# EAGLE board Minsys8051V3 (EAGLE 7.2.0)
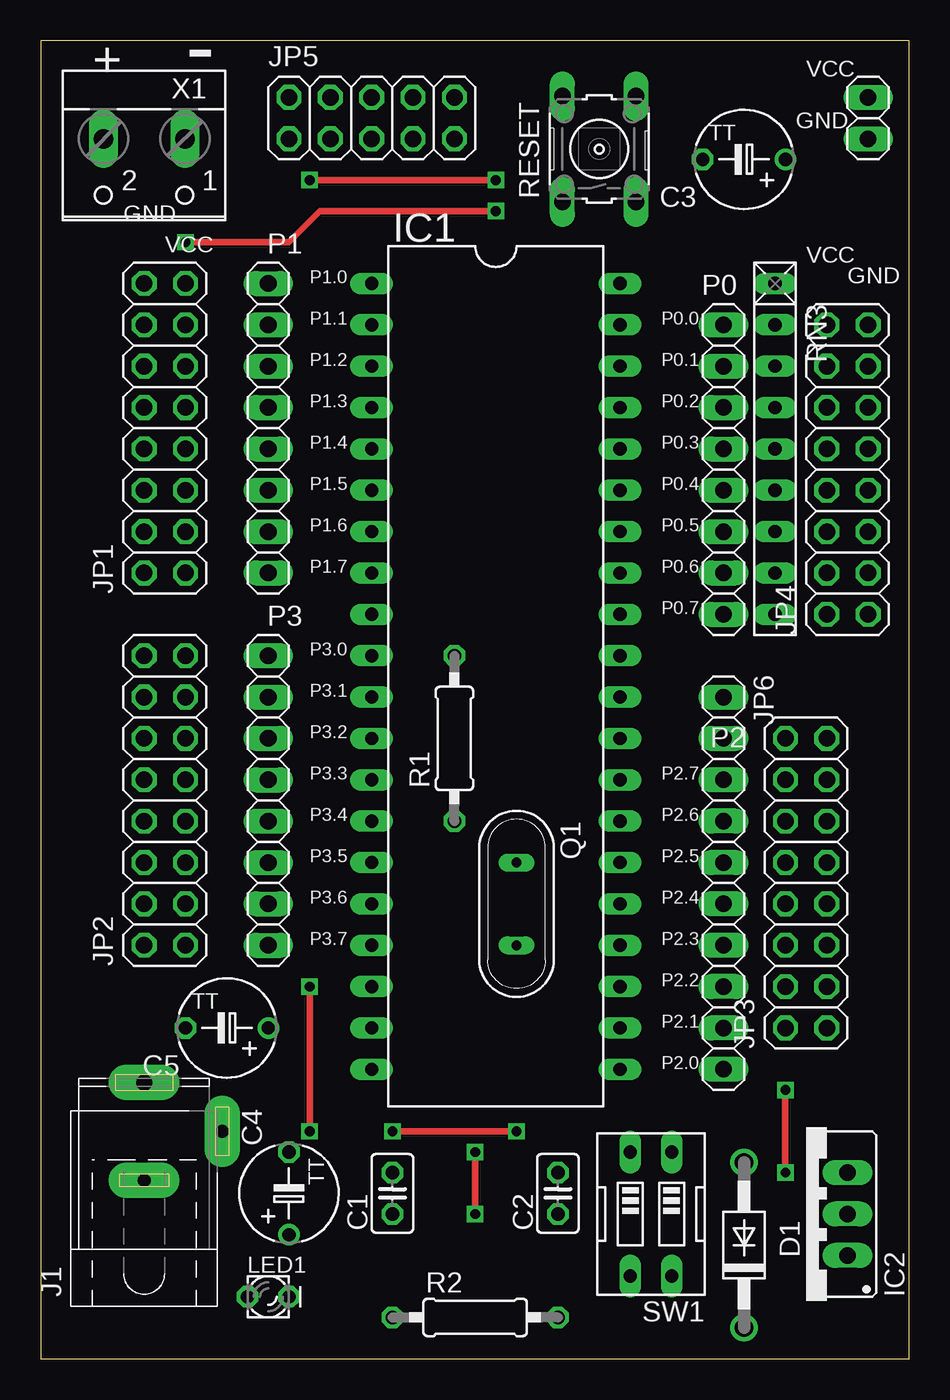
[diagram p0: board, top side]
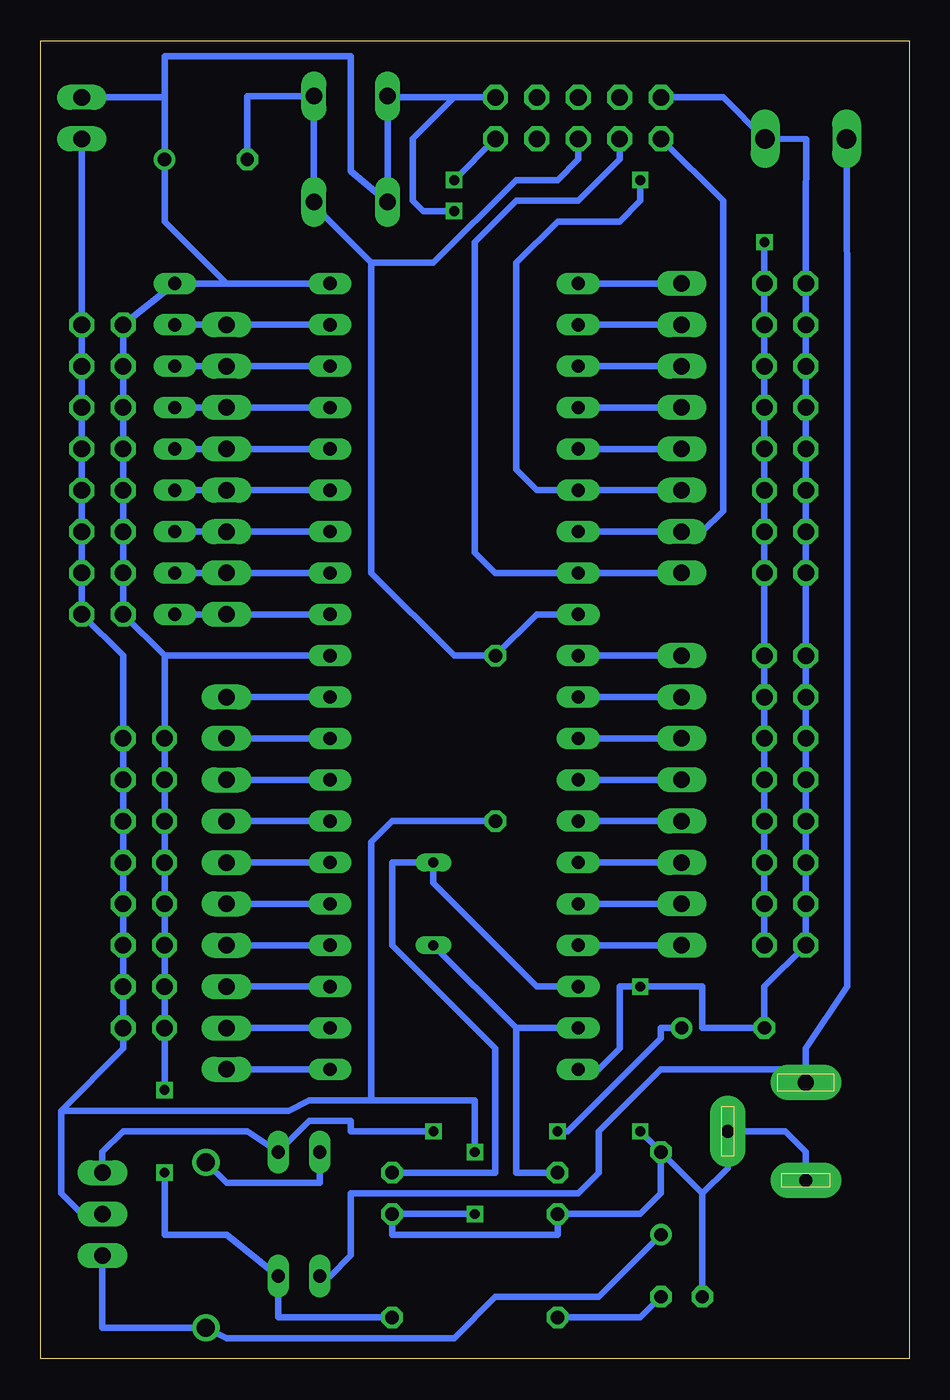
[diagram p1: board, bottom side, seen from below]

Size 53.32 x 80.95 mm. Coordinates in mm from the lower left corner, seen from the top.
Outline: 0,0 53.32,0 53.32,80.95 0,80.95 0,0
Copper layers (1*16): Top 0.035mm / dielectric 1.5mm / Bottom 0.035mm
Design rules "default": minimum track width 10mil, minimum drill 24mil, track to track 8mil, track to pad 8mil, pad to pad 8mil, via to via 8mil, smd to smd 8mil, copper to edge 40mil, drill to drill 8mil, minimum pad ring 10mil, minimum via ring 8mil, stop-mask expansion 4mil, vias tented up to drill 0mil, thermal gap 10mil

## Footprints (pad centres in the part's own frame; a part is rotated, then mirrored left to right if it is on the bottom)
C025-025X050 = drill 0.813 octagon: 1 -1.27,0; 2 1.27,0
TT5D6 = drill 0.813: + -2.54,0 | drill 0.813 octagon: - 2.54,0
DO41-10 = drill 1.118: A 5.08,0; C -5.08,0
DIL40 = drill 0.813 long: 1 -24.13,-7.62; 2 -21.59,-7.62; 3 -19.05,-7.62; 4 -16.51,-7.62; 5 -13.97,-7.62; 6 -11.43,-7.62; 7 -8.89,-7.62; 8 -6.35,-7.62; 9 -3.81,-7.62; 10 -1.27,-7.62; 11 1.27,-7.62; 12 3.81,-7.62; 13 6.35,-7.62; 14 8.89,-7.62; 15 11.43,-7.62; 16 13.97,-7.62; 17 16.51,-7.62; 18 19.05,-7.62; 19 21.59,-7.62; 20 24.13,-7.62; 21 24.13,7.62; 22 21.59,7.62; 23 19.05,7.62; 24 16.51,7.62; 25 13.97,7.62; 26 11.43,7.62; 27 8.89,7.62; 28 6.35,7.62; 29 3.81,7.62; 30 1.27,7.62; 31 -1.27,7.62; 32 -3.81,7.62; 33 -6.35,7.62; 34 -8.89,7.62; 35 -11.43,7.62; 36 -13.97,7.62; 37 -16.51,7.62; 38 -19.05,7.62; 39 -21.59,7.62; 40 -24.13,7.62
78XXS = drill 1.016 long: GND 0,-2.54; IN -2.54,-2.54; OUT 2.54,-2.54
SPC4078 = drill 0.8 pad 2.184 long: 1 -3,0; 2 0,-4.8 | drill 1 pad 2.184 long: 3 3,0
2X08 = drill 1.016 octagon: 1 -8.89,-1.27; 2 -8.89,1.27; 3 -6.35,-1.27; 4 -6.35,1.27; 5 -3.81,-1.27; 6 -3.81,1.27; 7 -1.27,-1.27; 8 -1.27,1.27; 9 1.27,-1.27; 10 1.27,1.27; 11 3.81,-1.27; 12 3.81,1.27; 13 6.35,-1.27; 14 6.35,1.27; 15 8.89,-1.27; 16 8.89,1.27
2X05 = drill 1.016 octagon: 1 -5.08,-1.27; 2 -5.08,1.27; 3 -2.54,-1.27; 4 -2.54,1.27; 5 0,-1.27; 6 0,1.27; 7 2.54,-1.27; 8 2.54,1.27; 9 5.08,-1.27; 10 5.08,1.27
1X02 = drill 1.016 long: 1 -1.27,0; 2 1.27,0
LED_LD260 = drill 0.813 octagon: A -1.27,0; K 1.27,0
1X08 = drill 1.016 long: 1 -8.89,0; 2 -6.35,0; 3 -3.81,0; 4 -1.27,0; 5 1.27,0; 6 3.81,0; 7 6.35,0; 8 8.89,0
QS = drill 0.61 long: 1 -2.54,0; 2 2.54,0
0207/10 = drill 0.813 octagon: 1 -5.08,0; 2 5.08,0
B3F-10XX = drill 1.016 long: 1 -3.251,2.261; 2 3.251,2.261; 3 -3.251,-2.261; 4 3.251,-2.261
RN-9 = drill 0.813 long: 1 -10.16,0; 2 -7.62,0; 3 -5.08,0; 4 -2.54,0; 5 0,0; 6 2.54,0; 7 5.08,0; 8 7.62,0; 9 10.16,0
EDG-02 = drill 0.813 long: 1 -1.27,-3.81; 2 1.27,-3.81; 3 1.27,3.81; 4 -1.27,3.81
W237-102 = drill 1.194 long: 1 -2.5,-1.27; 2 2.5,-1.27

## Placement (x,y rotation side)
C1  30pF  [C025-025X050]  21.59,10.16 90 top
C2  30pF  [C025-025X050]  31.75,10.16 90 top
C3  10uF  [TT5D6]  43.18,73.66 180 top
C4  0.33uF  [TT5D6]  15.24,10.16 90 top
C5  0.33uF  [TT5D6]  11.43,20.32 180 top
D1  1N4004  [DO41-10]  43.18,6.98 90 top
IC1  AT89C51-24PC  [DIL40]  27.94,41.91 270 top
IC2  7805  [78XXS]  46.99,8.89 90 top
J1  [SPC4078]  6.35,13.97 90 top
JP1  [2X08]  7.62,57.15 90 top
JP2  [2X08]  7.62,34.29 90 top
JP3  [2X08]  46.99,29.21 90 top
JP4  [2X08]  49.53,54.61 90 top
JP5  [2X05]  20.32,76.2 0 top
JP6  [1X02]  41.91,39.37 270 top
LED1  [LED_LD260]  13.97,3.81 0 top
P0  [1X08]  41.91,54.61 270 top
P1  [1X08]  13.97,57.15 270 top
P2  [1X08]  41.91,26.67 90 top
P3  [1X08]  13.97,34.29 270 top
Q1  11.0592 MHz  [QS]  29.21,27.94 270 top
R1  10k  [0207/10]  25.4,38.1 90 top
R2  220  [0207/10]  26.67,2.54 0 top
RESET  [B3F-10XX]  34.29,74.3 90 top
RN3  [RN-9]  45.09,55.88 270 top
SW1  [EDG-02]  37.47,8.89 180 top
VCCGND  [1X02]  50.8,76.2 270 top
X1  [W237-102]  6.35,73.66 180 top

## Library data of the parts
C1-C5 = resistor
D1 = diode
IC1 = atmel; OC_FARNELL: unknown; OC_NEWARK: unknown
IC2 = v-reg
J1 = con-jack; OC_FARNELL: unknown; OC_NEWARK: unknown
JP1-JP6 P0 P1-P3 VCCGND = pinhead
LED1 = eagle-ltspice; SPICEMODEL: NONE; SPICEPREFIX: D; SPICETYPE: diode
Q1 SW1 = special
R1 R2 = eagle-ltspice; SPICEMODEL: NONE; SPICEPREFIX: R
RESET = switch-omron; MPN: B3F-1000; OC_FARNELL: 176432; OC_NEWARK: 36M3542
RN3 = resistor-net; OC_FARNELL: unknown; OC_NEWARK: unknown
X1 = con-wago-500; MPN: 237-102; OC_FARNELL: unknown; OC_NEWARK: 70K9898

## Nets
GND: C1.1 C2.1 C4.- C5.- IC1.20 IC2.GND J1.1 J1.2 JP1.2 JP1.4 JP1.6 JP1.8 JP1.10 JP1.12 JP1.14 JP1.16 JP2.2 JP2.4 JP2.6 JP2.8 JP2.10 JP2.12 JP2.14 JP2.16 JP3.1 JP3.3 JP3.5 JP3.7 JP3.9 JP3.11 JP3.13 JP3.15 JP4.1 JP4.3 JP4.5 JP4.7 JP4.9 JP4.11 JP4.13 JP4.15 JP5.2 LED1.A R1.1 VCCGND.2 X1.1
MISO: IC1.7 JP5.1 P1.7
MOSI: IC1.6 JP5.9 P1.6
N$1: IC1.30 JP6.1
N$2: LED1.K R2.1
N$3: C1.2 IC1.19 Q1.2
N$4: C2.2 IC1.18 Q1.1
N$5: IC1.29 JP6.2
N$7: J1.3 SW1.3 X1.2
N$8: D1.A SW1.2
N$10: C5.+ IC2.OUT SW1.1
N$12: JP5.7
N$38: C4.+ D1.C IC2.IN
P00: IC1.39 P0.1 RN3.2
P01: IC1.38 P0.2 RN3.3
P02: IC1.37 P0.3 RN3.4
P03: IC1.36 P0.4 RN3.5
P04: IC1.35 P0.5 RN3.6
P05: IC1.34 P0.6 RN3.7
P06: IC1.33 P0.7 RN3.8
P07: IC1.32 P0.8 RN3.9
P10: IC1.1 P1.1
P11: IC1.2 P1.2
P12: IC1.3 P1.3
P13: IC1.4 P1.4
P14: IC1.5 P1.5
P20: IC1.21 P2.1
P21: IC1.22 P2.2
P22: IC1.23 P2.3
P23: IC1.24 P2.4
P24: IC1.25 P2.5
P25: IC1.26 P2.6
P26: IC1.27 P2.7
P27: IC1.28 P2.8
P30: IC1.10 P3.1
P31: IC1.11 P3.2
P32: IC1.12 P3.3
P33: IC1.13 P3.4
P34: IC1.14 P3.5
P35: IC1.15 P3.6
P36: IC1.16 P3.7
P37: IC1.17 P3.8
RST: C3.- IC1.9 JP5.5 R1.2 RESET.3 RESET.4
SCK: IC1.8 JP5.3 P1.8
VCC: C3.+ IC1.31 IC1.40 JP1.1 JP1.3 JP1.5 JP1.7 JP1.9 JP1.11 JP1.13 JP1.15 JP2.1 JP2.3 JP2.5 JP2.7 JP2.9 JP2.11 JP2.13 JP2.15 JP3.2 JP3.4 JP3.6 JP3.8 JP3.10 JP3.12 JP3.14 JP3.16 JP4.2 JP4.4 JP4.6 JP4.8 JP4.10 JP4.12 JP4.14 JP4.16 JP5.10 R2.2 RESET.1 RESET.2 RN3.1 SW1.4 VCCGND.1

## Tracks (layer width: path | path; a pad name or v marks a point on that pad's centre or on a via)
GND  (via drill 0.6)
  Top 0.406: v16.51,13.97 v16.51,22.86 | v26.67,8.89 v26.67,12.7
  Bottom 0.406: J1.1 6.35,12.7 7.62,13.97 J1.2 11.15,11.71 12.7,10.16 | C4.- 12.7,10.16 | 12.7,10.16 LED1.A | IC1.20 19.05,17.78 17.78,19.05 17.78,22.86 v16.51,22.86 12.7,22.86 12.7,20.32 C5.- 8.89,22.86 JP2.2 JP2.4 JP2.6 JP2.8 JP2.10 JP2.12 JP2.14 JP2.16 JP1.2 JP1.4 JP1.6 JP1.8 JP1.10 JP1.12 JP1.14 JP1.16 6.35,69.85 6.31,74.89 X1.1 8.89,74.93 11.43,77.47 JP5.2 | C4.- 15.24,10.16 16.51,8.89 C1.1 21.59,7.62 31.75,7.62 C2.1 v26.67,8.89 | VCCGND.2 JP4.15 JP4.13 JP4.11 JP4.9 JP4.7 JP4.5 JP4.3 JP4.1 48.26,43.18 JP3.15 JP3.13 JP3.11 JP3.9 JP3.7 JP3.5 JP3.3 JP3.1 48.26,19.05 52.07,15.24 | C4.- v16.51,13.97 | 52.07,15.24 52.07,10.16 50.8,8.89 IC2.GND | v26.67,12.7 26.67,15.88 33.02,15.88 | 33.02,15.88 36.83,15.88 38.1,15.24 52.07,15.24 | R1.1 31.75,33.02 33.02,31.75 33.02,15.88
MISO
  Bottom 0.406: IC1.7 P1.7 12.7,50.8 11.43,52.07 11.43,71.12 JP5.1
MOSI  (via drill 0.6)
  Top 0.406: v27.94,72.39 v16.51,72.39
  Bottom 0.406: P1.6 IC1.6 22.86,53.34 24.13,54.61 24.13,67.31 21.59,69.85 17.78,69.85 16.51,71.12 v16.51,72.39 | JP5.9 v27.94,72.39
N$1
  Bottom 0.406: IC1.30 JP6.1
N$2
  Bottom 0.406: LED1.K 16.51,2.54 R2.1
N$3
  Bottom 0.406: Q1.2 24.13,20.32 | 24.13,20.32 IC1.19 | C1.2 24.13,11.43 24.13,20.32
N$4
  Bottom 0.406: IC1.18 22.86,22.86 29.21,29.21 Q1.1 31.75,30.48 31.75,25.4 25.4,19.05 25.4,11.43 C2.2
N$5
  Bottom 0.406: IC1.29 JP6.2
N$7
  Bottom 0.406: X1.2 3.85,68.62 3.81,67.31 3.81,22.86 6.35,19.05 6.35,17.78 | 6.35,17.78 J1.3 | 6.35,17.78 15.24,17.78 19.05,13.97 19.05,11.43 20.32,10.16 34.29,10.16 34.29,6.35 35.56,5.08 SW1.3
N$8
  Bottom 0.406: SW1.2 36.2,10.79 41.91,10.79 D1.A
N$10  (via drill 0.6)
  Top 0.406: v21.59,13.97 v29.21,13.97
  Bottom 0.406: v29.21,13.97 34.29,13.97 34.29,14.61 36.83,14.61 SW1.1 40.64,13.97 48.26,13.97 49.53,12.7 IC2.OUT | C5.+ 15.24,20.32 15.24,19.68 20.95,13.97 v21.59,13.97
N$38
  Bottom 0.406: C4.+ 19.05,3.81 25.4,3.81 27.94,1.27 41.91,1.27 D1.C 49.53,1.91 IC2.IN
P00
  Bottom 0.406: RN3.2 P0.1 IC1.39
P01
  Bottom 0.406: RN3.3 P0.2 IC1.38
P02
  Bottom 0.406: IC1.37 P0.3 RN3.4
P03
  Bottom 0.406: IC1.36 P0.4 RN3.5
P04
  Bottom 0.406: IC1.35 P0.5 RN3.6
P05
  Bottom 0.406: IC1.34 P0.6 RN3.7
P06
  Bottom 0.406: IC1.33 P0.7 RN3.8
P07
  Bottom 0.406: IC1.32 P0.8 RN3.9
P10
  Bottom 0.406: P1.1 IC1.1
P11
  Bottom 0.406: P1.2 IC1.2
P12
  Bottom 0.406: P1.3 IC1.3
P13
  Bottom 0.406: P1.4 IC1.4
P14
  Bottom 0.406: P1.5 IC1.5
P20
  Bottom 0.406: IC1.21 P2.1
P21
  Bottom 0.406: IC1.22 P2.2
P22
  Bottom 0.406: IC1.23 P2.3
P23
  Bottom 0.406: IC1.24 P2.4
P24
  Bottom 0.406: IC1.25 P2.5
P25
  Bottom 0.406: IC1.26 P2.6
P26
  Bottom 0.406: IC1.27 P2.7
P27
  Bottom 0.406: IC1.28 P2.8
P30
  Bottom 0.406: IC1.10 P3.1
P31
  Bottom 0.406: IC1.11 P3.2
P32
  Bottom 0.406: IC1.12 P3.3
P33
  Bottom 0.406: IC1.13 P3.4
P34
  Bottom 0.406: IC1.14 P3.5
P35
  Bottom 0.406: IC1.15 P3.6
P36
  Bottom 0.406: IC1.16 P3.7
P37
  Bottom 0.406: IC1.17 P3.8
RST
  Bottom 0.406: C3.- 40.64,77.55 RESET.4 RESET.3 36.55,70.84 33.02,67.31 | IC1.9 22.86,45.72 R1.2 27.94,43.18 33.02,48.26 33.02,67.31 | JP5.5 20.32,73.66 21.59,72.39 24.13,72.39 29.21,67.31 33.02,67.31
SCK
  Bottom 0.406: P1.8 IC1.8 25.4,48.26 26.67,49.53 26.67,68.58 24.13,71.12 20.32,71.12 17.78,73.66 JP5.3
VCC  (via drill 0.6)
  Top 0.406: v45.72,16.51 v45.72,11.43 | v27.94,70.48 17.14,70.48 15.24,68.58 v8.89,68.58
  Bottom 0.406: 45.72,77.47 45.72,80.01 34.29,80.01 34.29,72.95 RESET.1 RESET.2 31.95,77.47 JP5.10 27.94,77.47 30.48,74.93 30.48,71.12 29.84,70.48 v27.94,70.48 | 45.72,77.47 C3.+ 45.72,69.85 41.91,66.04 IC1.40 RN3.1 JP4.16 JP4.14 JP4.12 JP4.10 JP4.8 JP4.6 JP4.4 JP4.2 45.72,43.18 | 45.72,43.18 IC1.31 | 45.72,43.18 JP3.16 JP3.14 JP3.12 JP3.10 JP3.8 JP3.6 JP3.4 JP3.2 v45.72,16.51 | JP2.1 JP2.3 JP2.5 JP2.7 JP2.9 JP2.11 JP2.13 JP2.15 JP1.1 JP1.3 JP1.5 JP1.7 JP1.9 JP1.11 JP1.13 JP1.15 v8.89,68.58 | R2.2 38.73,2.54 SW1.4 41.91,7.62 45.72,7.62 v45.72,11.43 | VCCGND.1 45.72,77.47

## Text on the board
tNames: + | - | VCC | GND | GND | VCC | VCC | P1.0 | GND | P1.1 | P0.0 | P1.2 | P0.1 | P1.3 | P0.2 | P1.4 | P0.3 | P1.5 | P0.4 | P1.6 | P0.5 | P1.7 | P0.6 | P0.7 | P3.0 | P3.1 | P3.2 | P3.3 | P2.7 | P3.4 | P2.6 | P3.5 | P2.5 | P3.6 | P2.4 | P3.7 | P2.3 | P2.2 | P2.1 | P2.0